# EAGLE board L6470 AutoDriver Panel v10 (EAGLE 6.4)
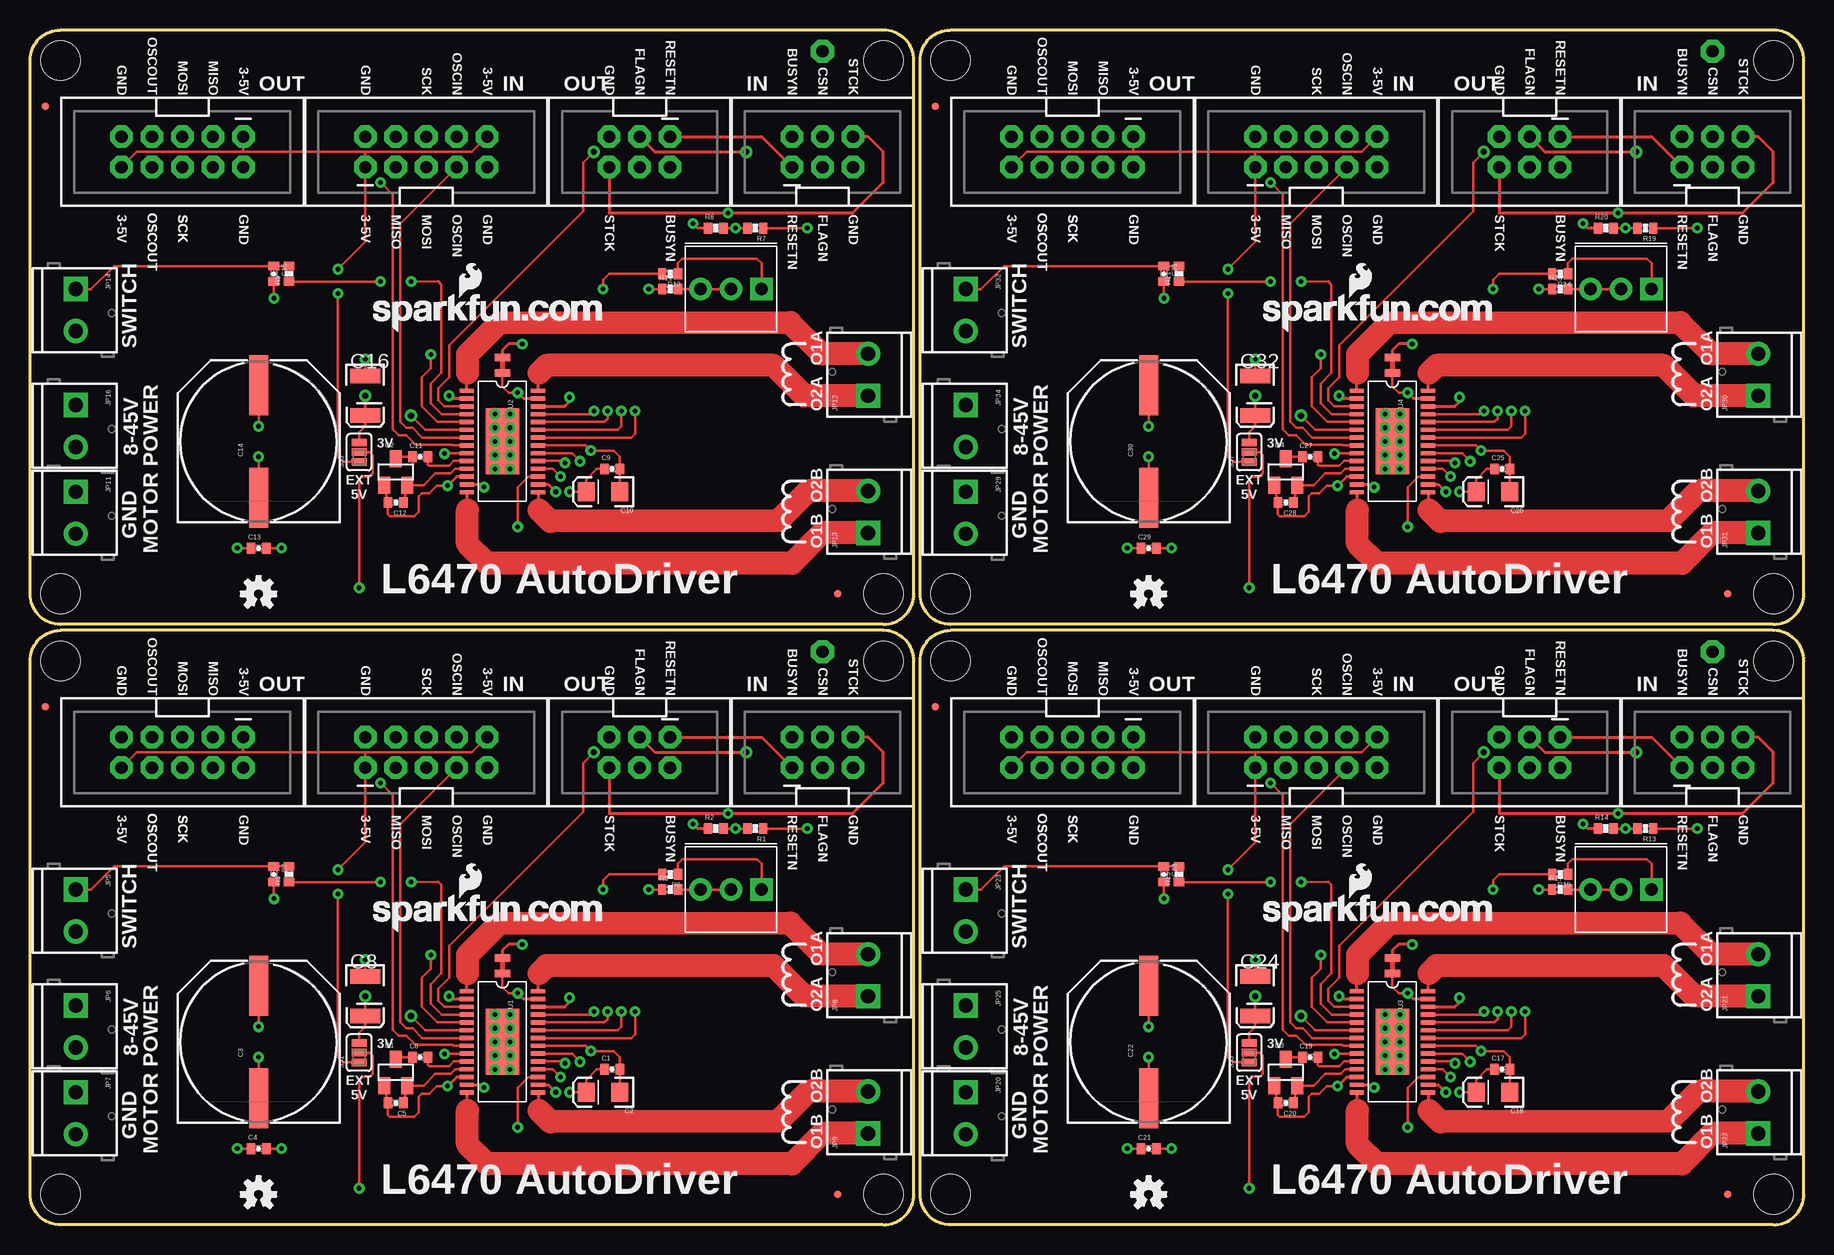
[diagram p0: board, top side]
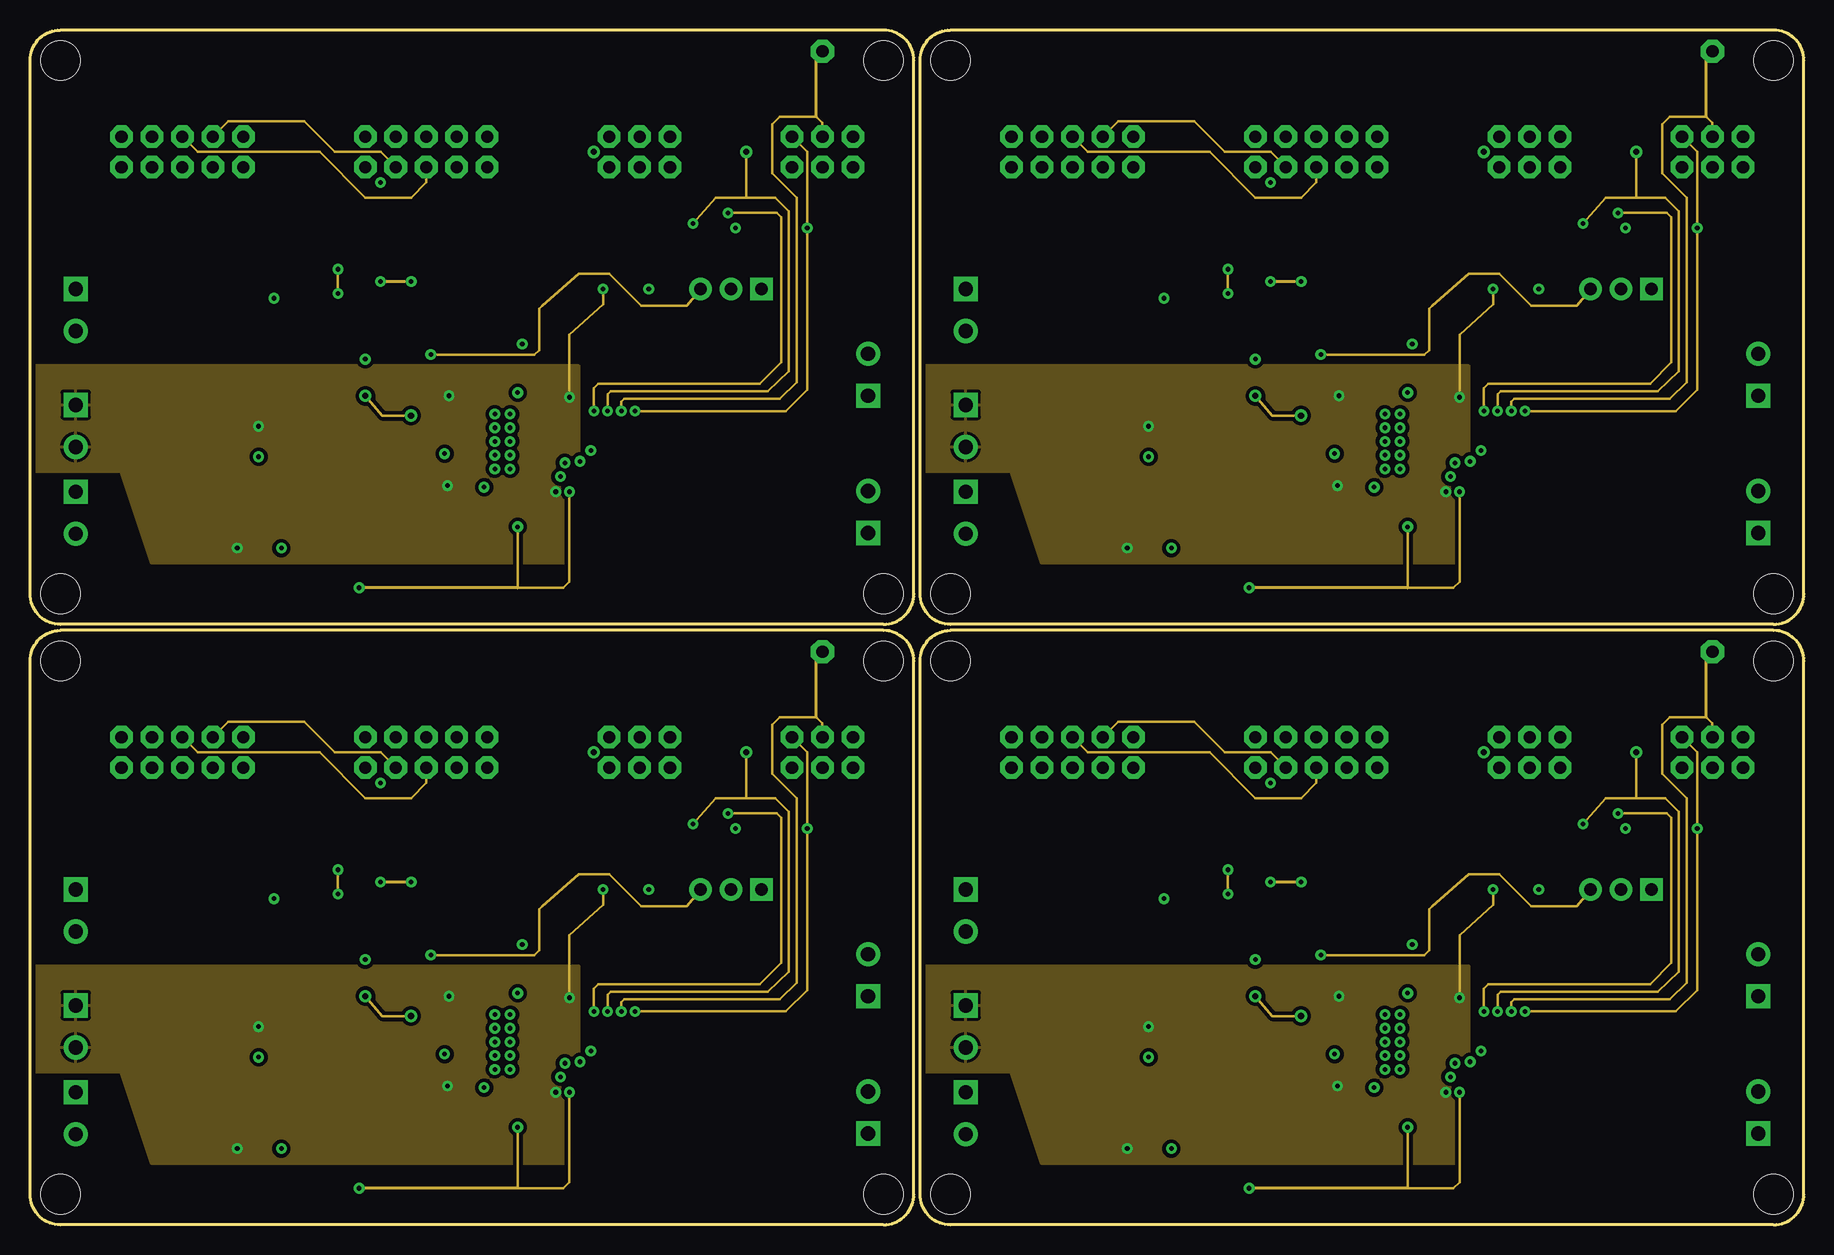
[diagram p1: board, inner layer Route2]
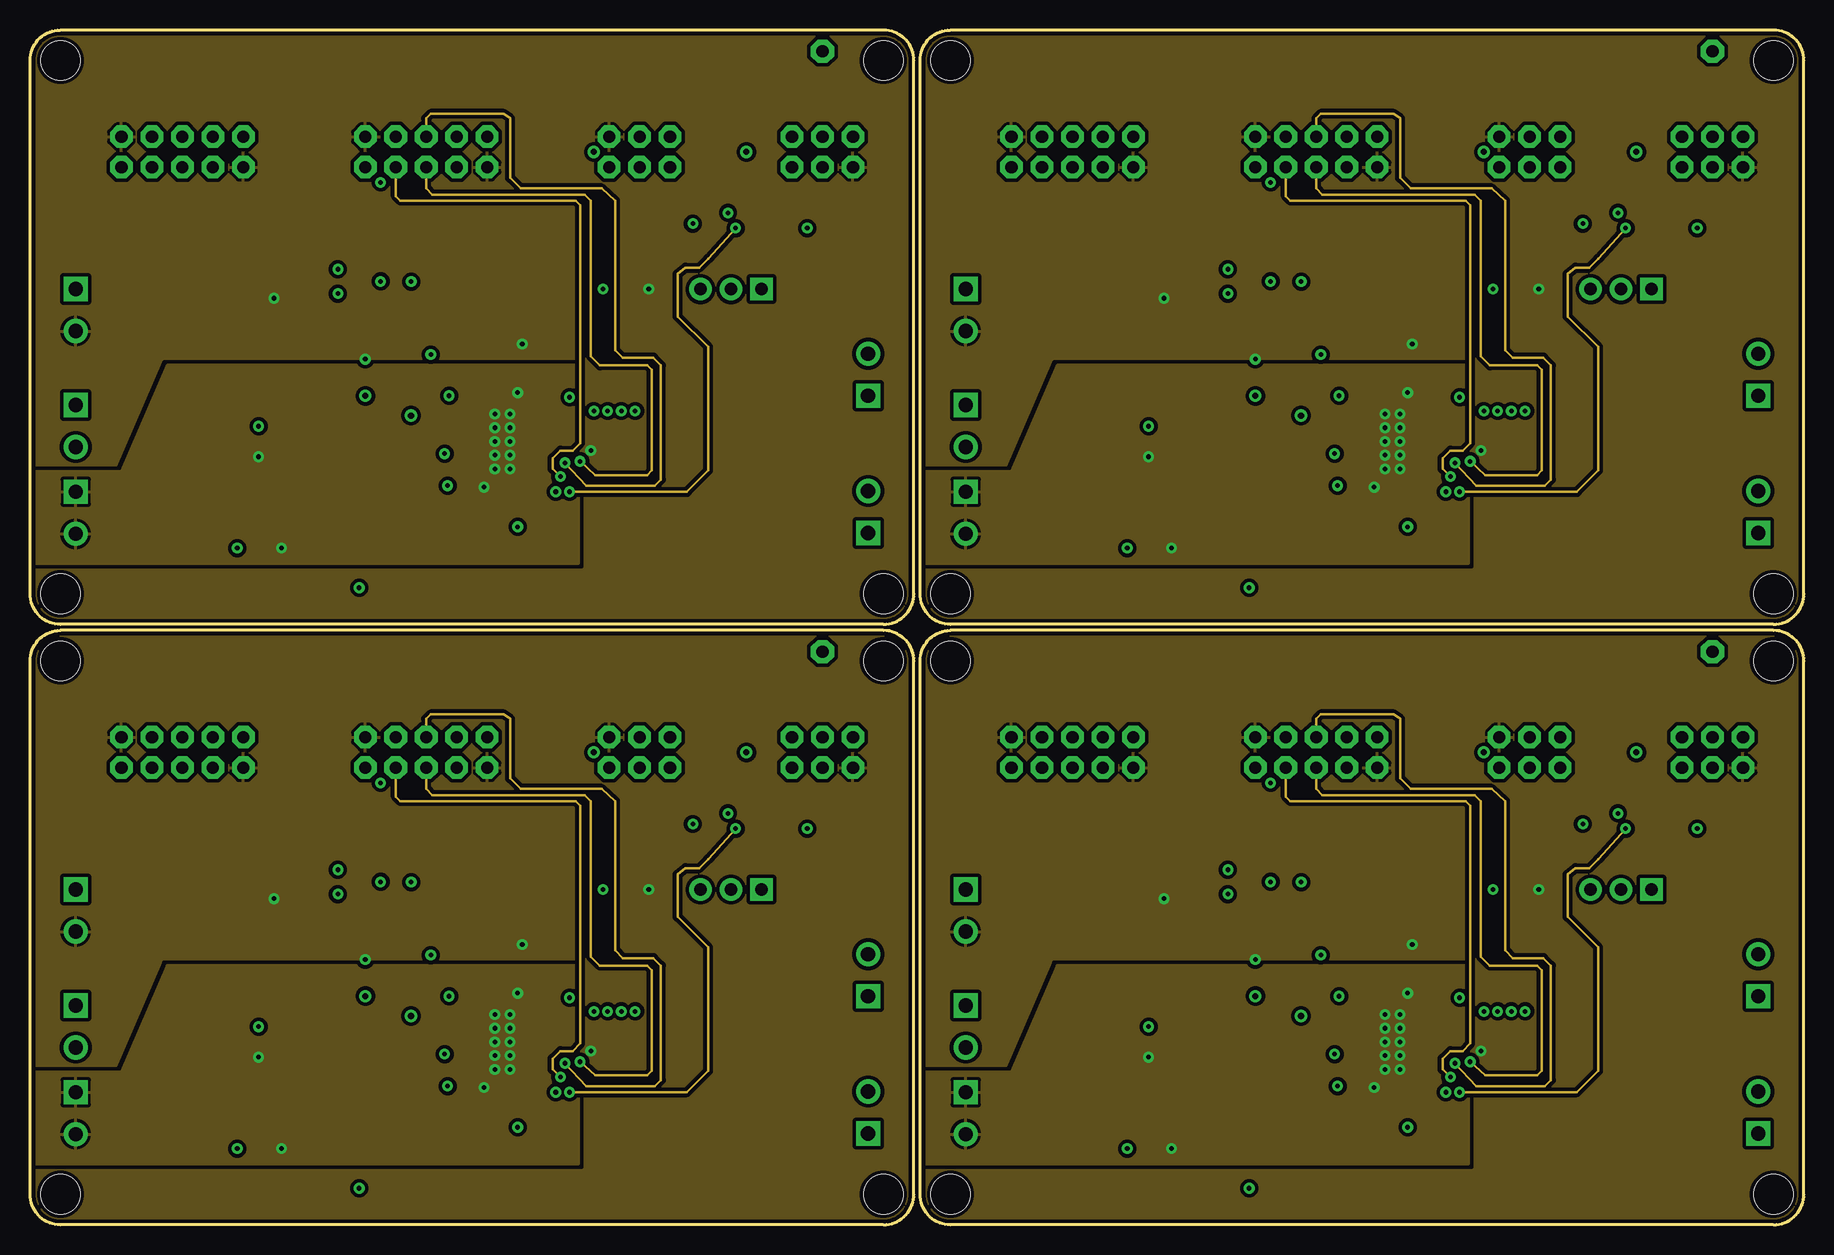
[diagram p2: board, inner layer Route15]
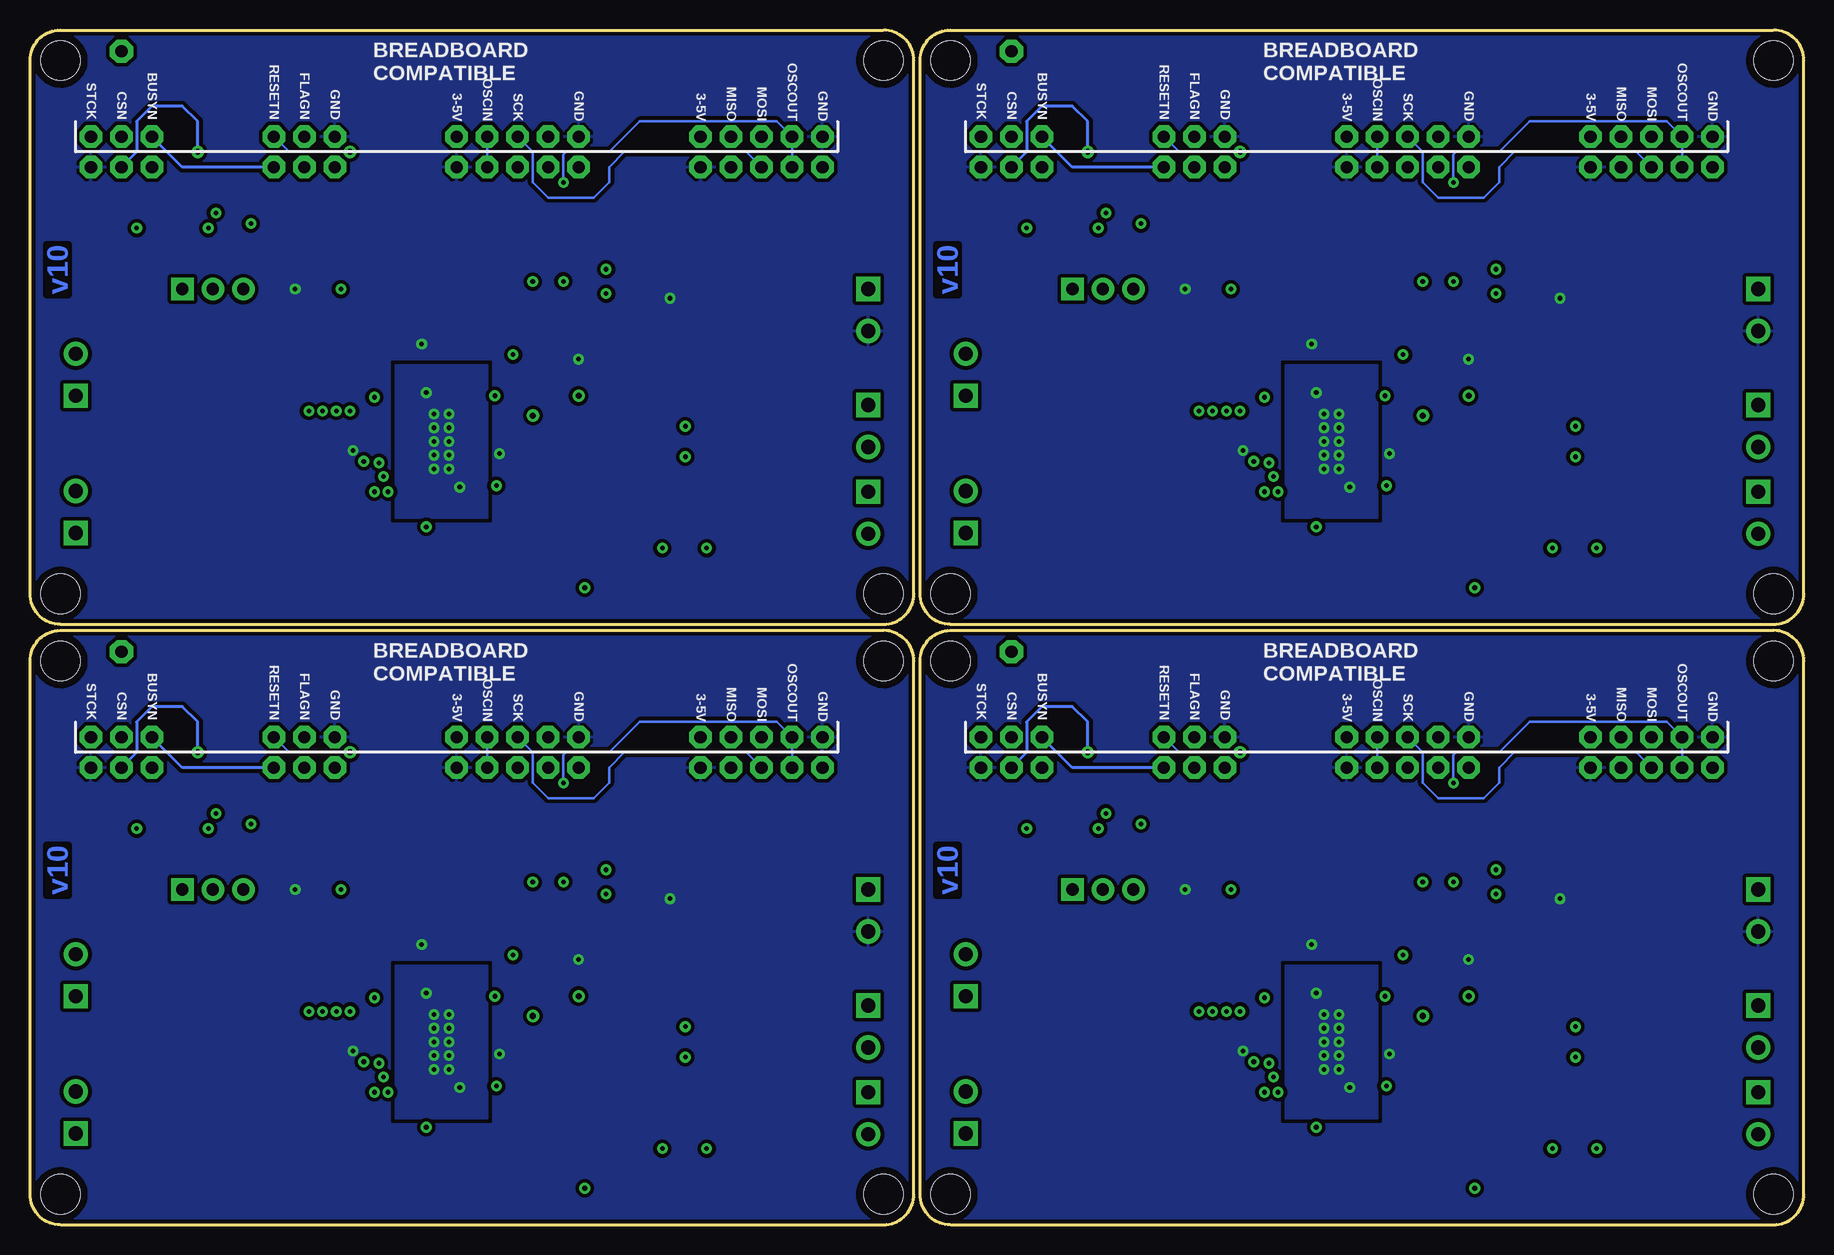
[diagram p3: board, bottom side, seen from below]

Size 147.83 x 99.57 mm. Coordinates in mm from the lower left corner, seen from the top.
Outline: 71.12,0 2.54,0 arc-90 0,2.54 0,46.99 arc-90 2.54,49.53 71.12,49.53 arc-90 73.66,46.99 73.66,2.54 arc-90 71.12,0
Outline: 71.12,50.04 2.54,50.04 arc-90 0,52.58 0,97.03 arc-90 2.54,99.57 71.12,99.57 arc-90 73.66,97.03 73.66,52.58 arc-90 71.12,50.04
Outline: 145.29,0 76.71,0 arc-90 74.17,2.54 74.17,46.99 arc-90 76.71,49.53 145.29,49.53 arc-90 147.83,46.99 147.83,2.54 arc-90 145.29,0
Outline: 145.29,50.04 76.71,50.04 arc-90 74.17,52.58 74.17,97.03 arc-90 76.71,99.57 145.29,99.57 arc-90 147.83,97.03 147.83,52.58 arc-90 145.29,50.04
Copper layers (1*2*15*16): Top 0.035mm / dielectric 1.5mm / Route2 0.035mm / dielectric 0.15mm / Route15 0.035mm / dielectric 0.2mm / Bottom 0.035mm
Design rules "default": minimum track width 8mil, minimum drill 15mil, track to track 8mil, track to pad 8mil, pad to pad 8mil, via to via 8mil, smd to smd 8mil, copper to edge 8mil, drill to drill 8mil, minimum pad ring 12mil, minimum via ring 10mil, stop-mask expansion 4mil, vias tented up to drill 20mil, thermal gap 10mil

## Footprints (pad centres in the part's own frame; a part is rotated, then mirrored left to right if it is on the bottom)
0402-CAP = smd 0.7 x 0.9: 1 -0.65,0; 2 0.65,0
EIA3216 = smd 1.4 x 1.6: A 1.4,0; C -1.4,0
PANASONIC_H13 = smd 5 x 1.6: + 4.7,0; - -4.7,0
EIA3528 = smd 1.2 x 2.5: A 1.65,0; C -1.65,0
SOT23 = smd 1 x 1.4: 1 -0.95,-1.1; 2 0.95,-1.1; 3 0,1.1
MICRO-FIDUCIAL = smd 0.635 x 0.635: 1 0,0
2X5-SHROUDED = drill 1.016 pad 1.88 octagon: 1 -1.27,5.08; 2 1.27,5.08; 3 -1.27,2.54; 4 1.27,2.54; 5 -1.27,0; 6 1.27,0; 7 -1.27,-2.54; 8 1.27,-2.54; 9 -1.27,-5.08; 10 1.27,-5.08
2X3-SHROUDED = drill 1.016 pad 1.88 octagon: 1 -1.27,2.54; 2 1.27,2.54; 3 -1.27,0; 4 1.27,0; 5 -1.27,-2.54; 6 1.27,-2.54
SCREWTERMINAL-3.5MM-2 = drill 1.2 pad 2.032 square: 1 0,0 | drill 1.2 pad 2.032: 2 3.5,0
0402-RES = smd 0.7 x 0.9: 1 -0.65,0; 2 0.65,0
3362U = drill 1.016 pad 1.88 square: P$1 0,2.54 | drill 1.016 pad 1.88: P$2 2.54,2.54; P$3 5.08,2.54
SJ_3_PASTE1&2 = smd 0.635 x 1.27: 1 -0.813,0; 2 0,0; 3 0.813,0
2PT_GND_TIE = smd 1.27 x 0.635: P$1 0,0.635; P$2 0,-0.635
STAND-OFF = hole 3.302: 0,0
HTSSOP28 = smd 0.36 x 1.19: 1 -4.225,-2.97; 2 -3.575,-2.97; 3 -2.925,-2.97; 4 -2.275,-2.97; 5 -1.625,-2.97; 6 -0.975,-2.97; 7 -0.325,-2.97; 8 0.325,-2.97; 9 0.975,-2.97; 10 1.625,-2.97; 11 2.275,-2.97; 12 2.925,-2.97; 13 3.575,-2.97; 14 4.225,-2.97; 15 4.225,2.97; 16 3.575,2.97; 17 2.925,2.97; 18 2.275,2.97; 19 1.625,2.97; 20 0.975,2.97; 21 0.325,2.97; 22 -0.325,2.97; 23 -0.975,2.97; 24 -1.625,2.97; 25 -2.275,2.97; 26 -2.925,2.97; 27 -3.575,2.97; 28 -4.225,2.97 | smd 5.5 x 2.8: 29 0,0

## Placement (x,y rotation side)
C1  0.1uF  [0402-CAP]  48.51,12.95 0 top
C2  10uF  [EIA3216]  47.75,11.05 180 top
C3  100uF  [PANASONIC_H13]  19.05,15.24 90 top
C4  0.22uF  [0402-CAP]  19.05,6.35 0 top
C5  10nF  [0402-CAP]  30.48,10.16 180 top
C6  10nF  [0402-CAP]  32.51,13.97 0 top
C7  10nF  [0402-CAP]  20.32,29.21 270 top
C8  47uF  [EIA3528]  27.94,19.05 270 top
C9  0.1uF  [0402-CAP]  48.51,62.99 0 top
C10  10uF  [EIA3216]  47.75,61.09 180 top
C11  10nF  [0402-CAP]  32.51,64.01 0 top
C12  10nF  [0402-CAP]  30.48,60.2 180 top
C13  0.22uF  [0402-CAP]  19.05,56.39 0 top
C14  100uF  [PANASONIC_H13]  19.05,65.28 90 top
C15  10nF  [0402-CAP]  20.32,79.25 270 top
C16  47uF  [EIA3528]  27.94,69.09 270 top
C17  0.1uF  [0402-CAP]  122.68,12.95 0 top
C18  10uF  [EIA3216]  121.92,11.05 180 top
C19  10nF  [0402-CAP]  106.68,13.97 0 top
C20  10nF  [0402-CAP]  104.65,10.16 180 top
C21  0.22uF  [0402-CAP]  93.22,6.35 0 top
C22  100uF  [PANASONIC_H13]  93.22,15.24 90 top
C23  10nF  [0402-CAP]  94.49,29.21 270 top
C24  47uF  [EIA3528]  102.11,19.05 270 top
C25  0.1uF  [0402-CAP]  122.68,62.99 0 top
C26  10uF  [EIA3216]  121.92,61.09 180 top
C27  10nF  [0402-CAP]  106.68,64.01 0 top
C28  10nF  [0402-CAP]  104.65,60.2 180 top
C29  0.22uF  [0402-CAP]  93.22,56.39 0 top
C30  100uF  [PANASONIC_H13]  93.22,65.28 90 top
C31  10nF  [0402-CAP]  94.49,79.25 270 top
C32  47uF  [EIA3528]  102.11,69.09 270 top
D1  BAV99  [SOT23]  30.48,12.7 0 top
D2  BAV99  [SOT23]  30.48,62.74 0 top
D3  BAV99  [SOT23]  104.65,12.7 0 top
D4  BAV99  [SOT23]  104.65,62.74 0 top
FID1  FIDUCIALUFIDUCIAL  [MICRO-FIDUCIAL]  67.31,2.54 0 top
FID2  FIDUCIALUFIDUCIAL  [MICRO-FIDUCIAL]  1.27,43.18 0 top
FID3  FIDUCIALUFIDUCIAL  [MICRO-FIDUCIAL]  67.31,52.58 0 top
FID4  FIDUCIALUFIDUCIAL  [MICRO-FIDUCIAL]  1.27,93.22 0 top
FID5  FIDUCIALUFIDUCIAL  [MICRO-FIDUCIAL]  141.48,2.54 0 top
FID6  FIDUCIALUFIDUCIAL  [MICRO-FIDUCIAL]  75.44,43.18 0 top
FID7  FIDUCIALUFIDUCIAL  [MICRO-FIDUCIAL]  141.48,52.58 0 top
FID8  FIDUCIALUFIDUCIAL  [MICRO-FIDUCIAL]  75.44,93.22 0 top
JP1  M05X2SHD  [2X5-SHROUDED]  33.02,39.37 90 top
JP2  M05X2SHD  [2X5-SHROUDED]  12.7,39.37 270 top
JP3  [2X3-SHROUDED]  50.8,39.37 270 top
JP4  [2X3-SHROUDED]  66.04,39.37 90 top
JP5  [SCREWTERMINAL-3.5MM-2]  3.81,27.94 270 top
JP6  [SCREWTERMINAL-3.5MM-2]  3.81,18.29 270 top
JP7  [SCREWTERMINAL-3.5MM-2]  3.81,11.05 270 top
JP8  [SCREWTERMINAL-3.5MM-2]  69.85,19.05 90 top
JP9  [SCREWTERMINAL-3.5MM-2]  69.85,7.62 90 top
JP10  M05X2SHD  [2X5-SHROUDED]  12.7,89.41 270 top
JP11  [SCREWTERMINAL-3.5MM-2]  3.81,61.09 270 top
JP12  [SCREWTERMINAL-3.5MM-2]  69.85,69.09 90 top
JP13  [SCREWTERMINAL-3.5MM-2]  69.85,57.66 90 top
JP14  [SCREWTERMINAL-3.5MM-2]  3.81,77.98 270 top
JP15  M05X2SHD  [2X5-SHROUDED]  33.02,89.41 90 top
JP16  [SCREWTERMINAL-3.5MM-2]  3.81,68.33 270 top
JP17  [2X3-SHROUDED]  50.8,89.41 270 top
JP18  [2X3-SHROUDED]  66.04,89.41 90 top
JP19  M05X2SHD  [2X5-SHROUDED]  86.87,39.37 270 top
JP20  [SCREWTERMINAL-3.5MM-2]  77.98,11.05 270 top
JP21  [SCREWTERMINAL-3.5MM-2]  144.02,19.05 90 top
JP22  [SCREWTERMINAL-3.5MM-2]  144.02,7.62 90 top
JP23  [SCREWTERMINAL-3.5MM-2]  77.98,27.94 270 top
JP24  M05X2SHD  [2X5-SHROUDED]  107.19,39.37 90 top
JP25  [SCREWTERMINAL-3.5MM-2]  77.98,18.29 270 top
JP26  [2X3-SHROUDED]  124.97,39.37 270 top
JP27  [2X3-SHROUDED]  140.21,39.37 90 top
JP28  M05X2SHD  [2X5-SHROUDED]  86.87,89.41 270 top
JP29  [SCREWTERMINAL-3.5MM-2]  77.98,61.09 270 top
JP30  [SCREWTERMINAL-3.5MM-2]  144.02,69.09 90 top
JP31  [SCREWTERMINAL-3.5MM-2]  144.02,57.66 90 top
JP32  [SCREWTERMINAL-3.5MM-2]  77.98,77.98 270 top
JP33  M05X2SHD  [2X5-SHROUDED]  107.19,89.41 90 top
JP34  [SCREWTERMINAL-3.5MM-2]  77.98,68.33 270 top
JP35  [2X3-SHROUDED]  124.97,89.41 270 top
JP36  [2X3-SHROUDED]  140.21,89.41 90 top
LOGO1  OSHW-LOGOS  [OSHW-LOGO-S]  19.05,2.54 0 top
LOGO2  LOGO-SFENEW  [SFE-NEW-WEBLOGO]  28.57,24.38 0 top
LOGO3  LOGO-SFENEW  [SFE-NEW-WEBLOGO]  28.57,74.42 0 top
LOGO4  OSHW-LOGOS  [OSHW-LOGO-S]  19.05,52.58 0 top
LOGO5  LOGO-SFENEW  [SFE-NEW-WEBLOGO]  102.74,24.38 0 top
LOGO6  OSHW-LOGOS  [OSHW-LOGO-S]  93.22,2.54 0 top
LOGO7  LOGO-SFENEW  [SFE-NEW-WEBLOGO]  102.74,74.42 0 top
LOGO8  OSHW-LOGOS  [OSHW-LOGO-S]  93.22,52.58 0 top
R1  10k  [0402-RES]  60.45,33.02 180 top
R2  10k  [0402-RES]  57.15,33.02 0 top
R3  100  [0402-RES]  21.59,29.21 90 top
R4  200k  [3362U]  60.96,30.48 180 top
R5  8.2k  [0402-RES]  53.34,27.94 0 top
R6  33k  [0402-RES]  53.34,29.21 180 top
R7  10k  [0402-RES]  60.45,83.06 180 top
R8  10k  [0402-RES]  57.15,83.06 0 top
R9  100  [0402-RES]  21.59,79.25 90 top
R10  200k  [3362U]  60.96,80.52 180 top
R11  8.2k  [0402-RES]  53.34,77.98 0 top
R12  33k  [0402-RES]  53.34,79.25 180 top
R13  10k  [0402-RES]  134.62,33.02 180 top
R14  10k  [0402-RES]  131.32,33.02 0 top
R15  100  [0402-RES]  95.76,29.21 90 top
R16  200k  [3362U]  135.13,30.48 180 top
R17  8.2k  [0402-RES]  127.51,27.94 0 top
R18  33k  [0402-RES]  127.51,29.21 180 top
R19  10k  [0402-RES]  134.62,83.06 180 top
R20  10k  [0402-RES]  131.32,83.06 0 top
R21  100  [0402-RES]  95.76,79.25 90 top
R22  200k  [3362U]  135.13,80.52 180 top
R23  8.2k  [0402-RES]  127.51,77.98 0 top
R24  33k  [0402-RES]  127.51,79.25 180 top
SJ1  [SJ_3_PASTE1&2]  27.43,14.35 90 top
SJ2  2PT_GND_TIE  [2PT_GND_TIE]  39.37,21.59 0 top
SJ3  [SJ_3_PASTE1&2]  27.43,64.39 90 top
SJ4  2PT_GND_TIE  [2PT_GND_TIE]  39.37,71.63 0 top
SJ5  [SJ_3_PASTE1&2]  101.6,14.35 90 top
SJ6  2PT_GND_TIE  [2PT_GND_TIE]  113.54,21.59 0 top
SJ7  [SJ_3_PASTE1&2]  101.6,64.39 90 top
SJ8  2PT_GND_TIE  [2PT_GND_TIE]  113.54,71.63 0 top
STANDOFF1  STAND-OFF  [STAND-OFF]  71.12,46.99 0 top
STANDOFF2  STAND-OFF  [STAND-OFF]  71.12,2.54 0 top
STANDOFF3  STAND-OFF  [STAND-OFF]  2.54,2.54 0 top
STANDOFF4  STAND-OFF  [STAND-OFF]  2.54,46.99 0 top
STANDOFF5  STAND-OFF  [STAND-OFF]  71.12,52.58 0 top
STANDOFF6  STAND-OFF  [STAND-OFF]  2.54,97.03 0 top
STANDOFF7  STAND-OFF  [STAND-OFF]  71.12,97.03 0 top
STANDOFF8  STAND-OFF  [STAND-OFF]  2.54,52.58 0 top
STANDOFF9  STAND-OFF  [STAND-OFF]  145.29,2.54 0 top
STANDOFF10  STAND-OFF  [STAND-OFF]  76.71,46.99 0 top
STANDOFF11  STAND-OFF  [STAND-OFF]  145.29,46.99 0 top
STANDOFF12  STAND-OFF  [STAND-OFF]  76.71,2.54 0 top
STANDOFF13  STAND-OFF  [STAND-OFF]  145.29,52.58 0 top
STANDOFF14  STAND-OFF  [STAND-OFF]  76.71,97.03 0 top
STANDOFF15  STAND-OFF  [STAND-OFF]  145.29,97.03 0 top
STANDOFF16  STAND-OFF  [STAND-OFF]  76.71,52.58 0 top
U1  L6470  [HTSSOP28]  39.37,15.24 270 top
U2  L6470  [HTSSOP28]  39.37,65.28 270 top
U3  L6470  [HTSSOP28]  113.54,15.24 270 top
U4  L6470  [HTSSOP28]  113.54,65.28 270 top
U$1  FOUR_LAYER_WARNING  [FOUR_LAYER_WARNING]  74.17,-2.54 0 top
U$4  FOUR_LAYER_WARNING  [FOUR_LAYER_WARNING]  0,-2.54 0 top

## Library data of the parts
C1 C9 C17 C25 = SparkFun-Capacitors; PROD_ID: CAP-00810
C2 C10 C18 C26 = SparkFun-Capacitors; PROD_ID: CAP-00811
C3 C14 C22 C30 = SparkFun-Capacitors; PROD_ID: CAP-08362
C4 C13 C21 C29 = SparkFun-Capacitors; PROD_ID: CAP-09885; VALUE: .22uF
C5-C7 C11 C12 C15 C19 C20 C23 C27 C28 C31 = SparkFun-Capacitors; PROD_ID: CAP-00867
C8 C16 C24 C32 = SparkFun-Capacitors; PROD_ID: CAP-08310
D1-D4 = SparkFun-DiscreteSemi; PROD_ID: DIO-10647
FID1-FID8 U$1 U$4 = SparkFun-Aesthetics
JP1-JP4 JP10 JP15 JP17-JP19 JP24 JP26-JP28 JP33 JP35 JP36 = SparkFun-Connectors
JP5-JP9 JP11-JP14 JP16 JP20-JP23 JP25 JP29-JP32 JP34 LOGO1-LOGO8 R4 R10 R16 R22 STANDOFF1-STANDOFF16 = SparkFun
R1 R2 R7 R8 R13 R14 R19 R20 = SparkFun-Resistors; PROD_ID: RES-00824
R3 R9 R15 R21 = SparkFun-Resistors; PROD_ID: RES-07863
R5 R11 R17 R23 = SparkFun-Resistors; PROD_ID: RES-10646
R6 R12 R18 R24 = SparkFun-Resistors; PROD_ID: RES-08416
SJ1-SJ8 = SparkFun-Passives
U1-U4 = SparkFun-PowerIC; PROD_ID: IC-10648

## Nets
3.3V: C8.A SJ1.3 U1.6
3.3V1: C16.A SJ3.3 U2.6
3.3V2: C24.A SJ5.3 U3.6
3.3V3: C32.A SJ7.3 U4.6
5V: JP1.1 JP1.10 JP2.1 JP2.10 SJ1.1
5V1: JP10.1 JP10.10 JP15.1 JP15.10 SJ3.1
5V2: JP19.1 JP19.10 JP24.1 JP24.10 SJ5.1
5V3: JP28.1 JP28.10 JP33.1 JP33.10 SJ7.1
ADC: R4.P$2 R4.P$3 R5.2 U1.5
ADC1: R10.P$2 R10.P$3 R11.2 U2.5
ADC2: R16.P$2 R16.P$3 R17.2 U3.5
ADC3: R22.P$2 R22.P$3 R23.2 U4.5
BUSYN: JP3.2 JP4.2 R1.1 U1.22
BUSYN1: JP17.2 JP18.2 R7.1 U2.22
BUSYN2: JP26.2 JP27.2 R13.1 U3.22
BUSYN3: JP35.2 JP36.2 R19.1 U4.22
CSN: JP4.4 U1.23
CSN1: JP18.4 U2.23
CSN2: JP27.4 U3.23
CSN3: JP36.4 U4.23
FLAGN: JP3.3 JP4.3 R2.1 U1.24
FLAGN1: JP17.3 JP18.3 R8.1 U2.24
FLAGN2: JP26.3 JP27.3 R14.1 U3.24
FLAGN3: JP35.3 JP36.3 R20.1 U4.24
GND: C1.2 C2.C C7.2 C8.C JP1.2 JP1.9 JP2.2 JP2.9 JP3.5 JP4.5 JP5.2 R5.1 SJ2.P$1 U1.9 U1.21
GND1: C9.2 C10.C C15.2 C16.C JP10.2 JP10.9 JP14.2 JP15.2 JP15.9 JP17.5 JP18.5 R11.1 SJ4.P$1 U2.9 U2.21
GND2: C17.2 C18.C C23.2 C24.C JP19.2 JP19.9 JP23.2 JP24.2 JP24.9 JP26.5 JP27.5 R17.1 SJ6.P$1 U3.9 U3.21
GND3: C25.2 C26.C C31.2 C32.C JP28.2 JP28.9 JP32.2 JP33.2 JP33.9 JP35.5 JP36.5 R23.1 SJ8.P$1 U4.9 U4.21
MISO: JP1.3 JP2.3 U1.18
MISO1: JP10.3 JP15.3 U2.18
MISO2: JP19.3 JP24.3 U3.18
MISO3: JP28.3 JP33.3 U4.18
MOSI: JP1.5 JP2.5 U1.20
MOSI1: JP10.5 JP15.5 U2.20
MOSI2: JP19.5 JP24.5 U3.20
MOSI3: JP28.5 JP33.5 U4.20
N$1: C11.2 U2.10
N$2: C11.1 D2.3
N$3: C12.1 D2.2 U2.11
N$4: R9.1 U2.4
N$5: R3.1 U1.4
N$6: C7.1 JP5.1 R3.2
N$7: C6.2 U1.10
N$8: C6.1 D1.3
N$9: C5.1 D1.2 U1.11
N$10: C15.1 JP14.1 R9.2
N$11: R4.P$1 R6.1
N$12: R10.P$1 R12.1
N$13: C19.2 U3.10
N$14: C19.1 D3.3
N$15: C20.1 D3.2 U3.11
N$16: R15.1 U3.4
N$17: C23.1 JP23.1 R15.2
N$18: R16.P$1 R18.1
N$19: C27.2 U4.10
N$20: C27.1 D4.3
N$21: C28.1 D4.2 U4.11
N$22: R21.1 U4.4
N$23: C31.1 JP32.1 R21.2
N$24: R22.P$1 R24.1
OSCIN: JP1.7 JP1.8 U1.7
OSCIN1: JP15.7 JP15.8 U2.7
OSCIN2: JP24.7 JP24.8 U3.7
OSCIN3: JP33.7 JP33.8 U4.7
OSCOUT: JP2.7 JP2.8 U1.8
OSCOUT1: JP10.7 JP10.8 U2.8
OSCOUT2: JP19.7 JP19.8 U3.8
OSCOUT3: JP28.7 JP28.8 U4.8
OUT1A: JP8.2 U1.1
OUT1A1: JP12.2 U2.1
OUT1A2: JP21.2 U3.1
OUT1A3: JP30.2 U4.1
OUT1B: JP9.1 U1.14
OUT1B1: JP13.1 U2.14
OUT1B2: JP22.1 U3.14
OUT1B3: JP31.1 U4.14
OUT2A: JP8.1 U1.28
OUT2A1: JP12.1 U2.28
OUT2A2: JP21.1 U3.28
OUT2A3: JP30.1 U4.28
OUT2B: JP9.2 U1.15
OUT2B1: JP13.2 U2.15
OUT2B2: JP22.2 U3.15
OUT2B3: JP31.2 U4.15
PGND: C3.- C4.2 JP7.1 JP7.2 SJ2.P$2 U1.13 U1.27 U1.29
PGND1: C13.2 C14.- JP11.1 JP11.2 SJ4.P$2 U2.13 U2.27 U2.29
PGND2: C21.2 C22.- JP20.1 JP20.2 SJ6.P$2 U3.13 U3.27 U3.29
PGND3: C29.2 C30.- JP29.1 JP29.2 SJ8.P$2 U4.13 U4.27 U4.29
RESETN: JP3.1 JP4.1 U1.3
RESETN1: JP17.1 JP18.1 U2.3
RESETN2: JP26.1 JP27.1 U3.3
RESETN3: JP35.1 JP36.1 U4.3
SCK: JP1.6 JP2.6 U1.19
SCK1: JP10.6 JP15.6 U2.19
SCK2: JP19.6 JP24.6 U3.19
SCK3: JP28.6 JP33.6 U4.19
STCK: JP3.6 JP4.6 U1.25
STCK1: JP17.6 JP18.6 U2.25
STCK2: JP26.6 JP27.6 U3.25
STCK3: JP35.6 JP36.6 U4.25
VLOGIC: C1.1 C2.A R1.2 R2.2 SJ1.2 U1.17
VLOGIC1: C9.1 C10.A R7.2 R8.2 SJ3.2 U2.17
VLOGIC2: C17.1 C18.A R13.2 R14.2 SJ5.2 U3.17
VLOGIC3: C25.1 C26.A R19.2 R20.2 SJ7.2 U4.17
VS: C3.+ C4.1 C5.2 D1.1 JP6.1 JP6.2 R6.2 U1.2 U1.12 U1.16 U1.26
VS1: C12.2 C13.1 C14.+ D2.1 JP16.1 JP16.2 R12.2 U2.2 U2.12 U2.16 U2.26
VS2: C20.2 C21.1 C22.+ D3.1 JP25.1 JP25.2 R18.2 U3.2 U3.12 U3.16 U3.26
VS3: C28.2 C29.1 C30.+ D4.1 JP34.1 JP34.2 R24.2 U4.2 U4.12 U4.16 U4.26

## Tracks (layer width: path | path; a pad name or v marks a point on that pad's centre or on a via)
3.3V  (via drill 0.51)
  Top 0.203: U1.6 32.93,16.21 v31.75,17.4 | v27.94,19.05 C8.A 27.94,16.51 27.43,16 SJ1.3
  Route2 0.203: v27.94,19.05 29.34,17.4 v31.75,17.4
3.3V1  (via drill 0.51)
  Top 0.203: U2.6 32.93,66.25 v31.75,67.44 | v27.94,69.09 C16.A 27.94,66.55 27.43,66.04 SJ3.3
  Route2 0.203: v27.94,69.09 29.34,67.44 v31.75,67.44
3.3V2  (via drill 0.51)
  Top 0.203: U3.6 107.1,16.21 v105.92,17.4 | v102.11,19.05 C24.A 102.11,16.51 101.6,16 SJ5.3
  Route2 0.203: v102.11,19.05 103.5,17.4 v105.92,17.4
3.3V3  (via drill 0.51)
  Top 0.203: U4.6 107.1,66.25 v105.92,67.44 | v102.11,69.09 C32.A 102.11,66.55 101.6,66.04 SJ7.3
  Route2 0.203: v102.11,69.09 103.5,67.44 v105.92,67.44
5V  (via drill 0.38)
  Top 0.203: SJ1.1 26.09,13.54 25.65,13.97 v25.65,27.56 | v25.65,29.59 27.94,31.88 JP1.1 27.94,39.37 | JP1.10 36.83,39.37 27.94,39.37 | 27.94,39.37 17.78,39.37 | 17.78,39.37 8.89,39.37 JP2.10 | JP2.1 17.78,39.37
  Route2 0.203: v25.65,27.56 v25.65,29.59
5V1  (via drill 0.38)
  Top 0.203: SJ3.1 26.09,63.58 25.65,64.01 v25.65,77.6 | v25.65,79.63 27.94,81.92 JP15.1 27.94,89.41 | JP15.10 36.83,89.41 27.94,89.41 | 27.94,89.41 17.78,89.41 | 17.78,89.41 8.89,89.41 JP10.10 | JP10.1 17.78,89.41
  Route2 0.203: v25.65,77.6 v25.65,79.63
5V2  (via drill 0.38)
  Top 0.203: SJ5.1 100.25,13.54 99.82,13.97 v99.82,27.56 | v99.82,29.59 102.11,31.88 JP24.1 102.11,39.37 | JP24.10 111,39.37 102.11,39.37 | 102.11,39.37 91.95,39.37 | 91.95,39.37 83.06,39.37 JP19.10 | JP19.1 91.95,39.37
  Route2 0.203: v99.82,27.56 v99.82,29.59
5V3  (via drill 0.38)
  Top 0.203: SJ7.1 100.25,63.58 99.82,64.01 v99.82,77.6 | v99.82,79.63 102.11,81.92 JP33.1 102.11,89.41 | JP33.10 111,89.41 102.11,89.41 | 102.11,89.41 91.95,89.41 | 91.95,89.41 83.06,89.41 JP28.10 | JP28.1 91.95,89.41
  Route2 0.203: v99.82,77.6 v99.82,79.63
ADC  (via drill 0.38)
  Top 0.203: U1.5 33.94,16.86 32.64,18.16 32.64,20.57 33.4,21.34 v33.4,22.48 | R5.2 R4.P$3 R4.P$2
  Route2 0.203: v33.4,22.48 42.04,22.48 42.42,22.86 42.42,26.29 42.67,26.54 45.72,29.21 48.26,29.21 50.93,26.54 54.74,26.54 R4.P$3
ADC1  (via drill 0.38)
  Top 0.203: U2.5 33.94,66.9 32.64,68.2 32.64,70.61 33.4,71.37 v33.4,72.52 | R11.2 R10.P$3 R10.P$2
  Route2 0.203: v33.4,72.52 42.04,72.52 42.42,72.9 42.42,76.33 42.67,76.58 45.72,79.25 48.26,79.25 50.93,76.58 54.74,76.58 R10.P$3
ADC2  (via drill 0.38)
  Top 0.203: U3.5 108.1,16.86 106.81,18.16 106.81,20.57 107.57,21.34 v107.57,22.48 | R17.2 R16.P$3 R16.P$2
  Route2 0.203: v107.57,22.48 116.2,22.48 116.59,22.86 116.59,26.29 116.84,26.54 119.89,29.21 122.43,29.21 125.09,26.54 128.91,26.54 R16.P$3
ADC3  (via drill 0.38)
  Top 0.203: U4.5 108.1,66.9 106.81,68.2 106.81,70.61 107.57,71.37 v107.57,72.52 | R23.2 R22.P$3 R22.P$2
  Route2 0.203: v107.57,72.52 116.2,72.52 116.59,72.9 116.59,76.33 116.84,76.58 119.89,79.25 122.43,79.25 125.09,76.58 128.91,76.58 R22.P$3
BUSYN  (via drill 0.38)
  Top 0.203: U1.22 50.11,15.56 50.42,15.88 v50.42,17.78 | R1.1 v64.77,33.02
  Route2 0.203: v50.42,17.78 62.99,17.78 64.77,19.56 v64.77,33.02 64.77,39.37 JP4.2
  Bottom 0.254: JP3.2 60.96,38.1 JP4.2
BUSYN1  (via drill 0.38)
  Top 0.203: U2.22 50.11,65.6 50.42,65.91 v50.42,67.82 | R7.1 v64.77,83.06
  Route2 0.203: v50.42,67.82 62.99,67.82 64.77,69.6 v64.77,83.06 64.77,89.41 JP18.2
  Bottom 0.254: JP17.2 60.96,88.14 JP18.2
BUSYN2  (via drill 0.38)
  Top 0.203: U3.22 124.28,15.56 124.59,15.88 v124.59,17.78 | R13.1 v138.94,33.02
  Route2 0.203: v124.59,17.78 137.16,17.78 138.94,19.56 v138.94,33.02 138.94,39.37 JP27.2
  Bottom 0.254: JP26.2 135.13,38.1 JP27.2
BUSYN3  (via drill 0.38)
  Top 0.203: U4.22 124.28,65.6 124.59,65.91 v124.59,67.82 | R19.1 v138.94,83.06
  Route2 0.203: v124.59,67.82 137.16,67.82 138.94,69.6 v138.94,83.06 138.94,89.41 JP36.2
  Bottom 0.254: JP35.2 135.13,88.14 JP36.2
CSN  (via drill 0.38, 1.02 pad 1.93)
  Top 0.203: U1.23 48.98,16.21 49.28,16.51 v49.28,17.78
  Route2 0.203: v49.28,17.78 49.28,18.54 49.53,18.8 62.48,18.8 63.88,20.19 63.88,35.56 61.85,37.59 61.85,41.66 62.48,42.29 65.53,42.29 66.04,41.78 JP4.4
  Route2 0.254: 65.53,42.29 65.53,47.24 v66.04,47.75
CSN1  (via drill 0.38, 1.02 pad 1.93)
  Top 0.203: U2.23 48.98,66.25 49.28,66.55 v49.28,67.82
  Route2 0.203: v49.28,67.82 49.28,68.58 49.53,68.83 62.48,68.83 63.88,70.23 63.88,85.6 61.85,87.63 61.85,91.69 62.48,92.33 65.53,92.33 66.04,91.82 JP18.4
  Route2 0.254: 65.53,92.33 65.53,97.28 v66.04,97.79
CSN2  (via drill 0.38, 1.02 pad 1.93)
  Top 0.203: U3.23 123.15,16.21 123.44,16.51 v123.44,17.78
  Route2 0.203: v123.44,17.78 123.44,18.54 123.7,18.8 136.65,18.8 138.05,20.19 138.05,35.56 136.02,37.59 136.02,41.66 136.65,42.29 139.7,42.29 140.21,41.78 JP27.4
  Route2 0.254: 139.7,42.29 139.7,47.24 v140.21,47.75
CSN3  (via drill 0.38, 1.02 pad 1.93)
  Top 0.203: U4.23 123.15,66.25 123.44,66.55 v123.44,67.82
  Route2 0.203: v123.44,67.82 123.44,68.58 123.7,68.83 136.65,68.83 138.05,70.23 138.05,85.6 136.02,87.63 136.02,91.69 136.65,92.33 139.7,92.33 140.21,91.82 JP36.4
  Route2 0.254: 139.7,92.33 139.7,97.28 v140.21,97.79
FLAGN  (via drill 0.38, 0.51)
  Top 0.203: U1.24 47.85,16.86 48.13,17.14 v48.13,17.78
  Top 0.254: JP3.3 52.07,39.37 v59.69,39.37 | R2.1 55.63,33.02 v55.24,33.4
  Route2 0.203: v48.13,17.78 48.13,19.18 48.39,19.43 61.47,19.43 63.25,21.08 63.25,34.42 62.1,35.56 59.69,35.56 | v55.24,33.4 57.15,35.56 59.69,35.56 | v59.69,39.37 59.69,35.56
  Bottom 0.254: v59.69,39.37 59.69,41.91 60.96,43.18 63.5,43.18 64.77,41.91 64.77,39.37 JP4.3
FLAGN1  (via drill 0.38, 0.51)
  Top 0.203: U2.24 47.85,66.9 48.13,67.18 v48.13,67.82
  Top 0.254: JP17.3 52.07,89.41 v59.69,89.41 | R8.1 55.63,83.06 v55.24,83.44
  Route2 0.203: v48.13,67.82 48.13,69.22 48.39,69.47 61.47,69.47 63.25,71.12 63.25,84.45 62.1,85.6 59.69,85.6 | v55.24,83.44 57.15,85.6 59.69,85.6 | v59.69,89.41 59.69,85.6
  Bottom 0.254: v59.69,89.41 59.69,91.95 60.96,93.22 63.5,93.22 64.77,91.95 64.77,89.41 JP18.3
FLAGN2  (via drill 0.38, 0.51)
  Top 0.203: U3.24 122.02,16.86 122.3,17.14 v122.3,17.78
  Top 0.254: JP26.3 126.24,39.37 v133.86,39.37 | R14.1 129.79,33.02 v129.41,33.4
  Route2 0.203: v122.3,17.78 122.3,19.18 122.56,19.43 135.64,19.43 137.41,21.08 137.41,34.42 136.27,35.56 133.86,35.56 | v129.41,33.4 131.32,35.56 133.86,35.56 | v133.86,39.37 133.86,35.56
  Bottom 0.254: v133.86,39.37 133.86,41.91 135.13,43.18 137.67,43.18 138.94,41.91 138.94,39.37 JP27.3
FLAGN3  (via drill 0.38, 0.51)
  Top 0.203: U4.24 122.02,66.9 122.3,67.18 v122.3,67.82
  Top 0.254: JP35.3 126.24,89.41 v133.86,89.41 | R20.1 129.79,83.06 v129.41,83.44
  Route2 0.203: v122.3,67.82 122.3,69.22 122.56,69.47 135.64,69.47 137.41,71.12 137.41,84.45 136.27,85.6 133.86,85.6 | v129.41,83.44 131.32,85.6 133.86,85.6 | v133.86,89.41 133.86,85.6
  Bottom 0.254: v133.86,89.41 133.86,91.95 135.13,93.22 137.67,93.22 138.94,91.95 138.94,89.41 JP36.3
GND  (via drill 0.38)
  Top 0.203: U1.21 46.3,14.91 v46.74,14.48 48.64,14.48 49.16,13.96 C1.2 C2.C | R5.1 v51.56,27.94 | U1.9 34.59,14.27 v34.54,14.22 | C8.C v27.94,22.1 | C7.2 v20.32,27.18
  Top 0.254: v41.02,23.37 39.88,23.37 39.37,22.86 SJ2.P$1
  pour Route15 (isolate 0.305, rank 2): 71.12,0 2.54,0 arc-90 0,2.54 0,46.99 arc-90 2.54,49.53 71.12,49.53 arc-90 73.66,46.99 73.66,2.54 arc-90
  pour Bottom (isolate 0.305, rank 2): 71.12,0 2.54,0 arc-90 0,2.54 0,46.99 arc-90 2.54,49.53 71.12,49.53 arc-90 73.66,46.99 73.66,2.54 arc-90
GND1  (via drill 0.38)
  Top 0.203: U2.21 46.3,64.95 v46.74,64.52 48.64,64.52 49.16,63.99 C9.2 C10.C | R11.1 v51.56,77.98 | U2.9 34.59,64.3 v34.54,64.26 | C16.C v27.94,72.14 | C15.2 v20.32,77.22
  Top 0.254: v41.02,73.41 39.88,73.41 39.37,72.9 SJ4.P$1
  pour Route15 (isolate 0.305, rank 2): 71.12,50.04 2.54,50.04 arc-90 0,52.58 0,97.03 arc-90 2.54,99.57 71.12,99.57 arc-90 73.66,97.03 73.66,52.58 arc-90
  pour Bottom (isolate 0.305, rank 2): 71.12,50.04 2.54,50.04 arc-90 0,52.58 0,97.03 arc-90 2.54,99.57 71.12,99.57 arc-90 73.66,97.03 73.66,52.58 arc-90
GND2  (via drill 0.38)
  Top 0.203: U3.21 120.47,14.91 v120.9,14.48 122.81,14.48 123.33,13.96 C17.2 C18.C | R17.1 v125.73,27.94 | U3.9 108.75,14.27 v108.71,14.22 | C24.C v102.11,22.1 | C23.2 v94.49,27.18
  Top 0.254: v115.19,23.37 114.05,23.37 113.54,22.86 SJ6.P$1
  pour Route15 (isolate 0.305, rank 2): 145.29,0 76.71,0 arc-90 74.17,2.54 74.17,46.99 arc-90 76.71,49.53 145.29,49.53 arc-90 147.83,46.99 147.83,2.54 arc-90
  pour Bottom (isolate 0.305, rank 2): 145.29,0 76.71,0 arc-90 74.17,2.54 74.17,46.99 arc-90 76.71,49.53 145.29,49.53 arc-90 147.83,46.99 147.83,2.54 arc-90
GND3  (via drill 0.38)
  Top 0.203: U4.21 120.47,64.95 v120.9,64.52 122.81,64.52 123.33,63.99 C25.2 C26.C | R23.1 v125.73,77.98 | U4.9 108.75,64.3 v108.71,64.26 | C32.C v102.11,72.14 | C31.2 v94.49,77.22
  Top 0.254: v115.19,73.41 114.05,73.41 113.54,72.9 SJ8.P$1
  pour Route15 (isolate 0.305, rank 2): 145.29,50.04 76.71,50.04 arc-90 74.17,52.58 74.17,97.03 arc-90 76.71,99.57 145.29,99.57 arc-90 147.83,97.03 147.83,52.58 arc-90
  pour Bottom (isolate 0.305, rank 2): 145.29,50.04 76.71,50.04 arc-90 74.17,52.58 74.17,97.03 arc-90 76.71,99.57 145.29,99.57 arc-90 147.83,97.03 147.83,52.58 arc-90
MISO  (via drill 0.38)
  Top 0.203: U1.18 43.55,12.96 v44.2,12.32
  Route2 0.203: JP2.3 16.51,41.91 22.86,41.91 25.4,39.37 29.21,39.37 JP1.3
  Route15 0.203: v44.2,12.32 43.56,12.95 43.56,13.84 44.2,14.48 45.21,14.48 45.85,15.11 45.85,34.92 45.47,35.31 30.86,35.31 30.48,35.69 JP1.3
MISO1  (via drill 0.38)
  Top 0.203: U2.18 43.55,63 v44.2,62.36
  Route2 0.203: JP10.3 16.51,91.95 22.86,91.95 25.4,89.41 29.21,89.41 JP15.3
  Route15 0.203: v44.2,62.36 43.56,62.99 43.56,63.88 44.2,64.52 45.21,64.52 45.85,65.15 45.85,84.96 45.47,85.34 30.86,85.34 30.48,85.72 JP15.3
MISO2  (via drill 0.38)
  Top 0.203: U3.18 117.72,12.96 v118.36,12.32
  Route2 0.203: JP19.3 90.68,41.91 97.03,41.91 99.57,39.37 103.38,39.37 JP24.3
  Route15 0.203: v118.36,12.32 117.73,12.95 117.73,13.84 118.36,14.48 119.38,14.48 120.02,15.11 120.02,34.92 119.63,35.31 105.03,35.31 104.65,35.69 JP24.3
MISO3  (via drill 0.38)
  Top 0.203: U4.18 117.72,63 v118.36,62.36
  Route2 0.203: JP28.3 90.68,91.95 97.03,91.95 99.57,89.41 103.38,89.41 JP33.3
  Route15 0.203: v118.36,62.36 117.73,62.99 117.73,63.88 118.36,64.52 119.38,64.52 120.02,65.15 120.02,84.96 119.63,85.34 105.03,85.34 104.65,85.72 JP33.3
MOSI  (via drill 0.38)
  Top 0.203: U1.20 45.17,14.27 v45.85,13.59
  Route2 0.203: JP2.5 13.97,39.37 24.13,39.37 27.94,35.56 31.75,35.56 33.02,36.83 JP1.5
  Route15 0.203: v45.85,13.59 47.12,12.45 51.44,12.45 51.82,12.83 51.82,21.21 51.44,21.59 47.5,21.59 46.74,22.35 46.74,35.31 46.23,35.81 33.53,35.81 33.02,36.32 JP1.5
MOSI1  (via drill 0.38)
  Top 0.203: U2.20 45.17,64.3 v45.85,63.63
  Route2 0.203: JP10.5 13.97,89.41 24.13,89.41 27.94,85.6 31.75,85.6 33.02,86.87 JP15.5
  Route15 0.203: v45.85,63.63 47.12,62.48 51.44,62.48 51.82,62.87 51.82,71.25 51.44,71.63 47.5,71.63 46.74,72.39 46.74,85.34 46.23,85.85 33.53,85.85 33.02,86.36 JP15.5
MOSI2  (via drill 0.38)
  Top 0.203: U3.20 119.34,14.27 v120.02,13.59
  Route2 0.203: JP19.5 88.14,39.37 98.3,39.37 102.11,35.56 105.92,35.56 107.19,36.83 JP24.5
  Route15 0.203: v120.02,13.59 121.28,12.45 125.6,12.45 125.98,12.83 125.98,21.21 125.6,21.59 121.67,21.59 120.9,22.35 120.9,35.31 120.4,35.81 107.7,35.81 107.19,36.32 JP24.5
MOSI3  (via drill 0.38)
  Top 0.203: U4.20 119.34,64.3 v120.02,63.63
  Route2 0.203: JP28.5 88.14,89.41 98.3,89.41 102.11,85.6 105.92,85.6 107.19,86.87 JP33.5
  Route15 0.203: v120.02,63.63 121.28,62.48 125.6,62.48 125.98,62.87 125.98,71.25 125.6,71.63 121.67,71.63 120.9,72.39 120.9,85.34 120.4,85.85 107.7,85.85 107.19,86.36 JP33.5
N$1
  Top 0.203: C11.2 33.16,63.36 33.27,63.25 34.92,63.25 35.33,63.65 U2.10
N$2
  Top 0.203: C11.1 30.65,64.01 D2.3
N$3
  Top 0.203: U2.11 35.44,63 35.05,62.61 33.78,62.61 32.81,61.64 D2.2 C12.1
N$4  (via drill 0.38)
  Top 0.203: U2.4 34.3,67.55 33.4,68.45 33.4,70.1 34.29,70.99 34.29,78.36 34.04,78.61 v31.77,78.6 | R9.1 29.2,78.6 v29.21,78.61
  Route2 0.254: v29.21,78.61 31.75,78.61 v31.77,78.6
N$5  (via drill 0.38)
  Top 0.203: U1.4 34.3,17.52 33.4,18.41 33.4,20.07 34.29,20.95 34.29,28.32 34.04,28.57 v31.77,28.56 | R3.1 29.2,28.56 v29.21,28.57
  Route2 0.254: v29.21,28.57 31.75,28.57 v31.77,28.56
N$6
  Top 0.203: JP5.1 5.08,27.94 7,29.86 C7.1 R3.2
N$7
  Top 0.203: C6.2 33.16,13.32 33.27,13.21 34.92,13.21 35.33,13.62 U1.10
N$8
  Top 0.203: C6.1 30.65,13.97 D1.3
N$9
  Top 0.203: U1.11 35.44,12.96 35.05,12.57 33.78,12.57 32.81,11.6 D1.2 C5.1
N$10
  Top 0.203: JP14.1 5.08,77.98 7,79.9 C15.1 R9.2
N$11
  Top 0.203: R6.1 53.99,30.08 54.36,30.48 60.58,30.48 60.96,30.1 R4.P$1
N$12
  Top 0.203: R12.1 53.99,80.12 54.36,80.52 60.58,80.52 60.96,80.14 R10.P$1
N$13
  Top 0.203: C19.2 107.33,13.32 107.44,13.21 109.09,13.21 109.5,13.62 U3.10
N$14
  Top 0.203: C19.1 104.82,13.97 D3.3
N$15
  Top 0.203: U3.11 109.61,12.96 109.22,12.57 107.95,12.57 106.98,11.6 D3.2 C20.1
N$16  (via drill 0.38)
  Top 0.203: U3.4 108.47,17.52 107.57,18.41 107.57,20.07 108.46,20.95 108.46,28.32 108.2,28.57 v105.93,28.56 | R15.1 103.36,28.56 v103.38,28.57
  Route2 0.254: v103.38,28.57 105.92,28.57 v105.93,28.56
N$17
  Top 0.203: JP23.1 79.25,27.94 81.17,29.86 C23.1 R15.2
N$18
  Top 0.203: R18.1 128.16,30.08 128.52,30.48 134.75,30.48 135.13,30.1 R16.P$1
N$19
  Top 0.203: C27.2 107.33,63.36 107.44,63.25 109.09,63.25 109.5,63.65 U4.10
N$20
  Top 0.203: C27.1 104.82,64.01 D4.3
N$21
  Top 0.203: U4.11 109.61,63 109.22,62.61 107.95,62.61 106.98,61.64 D4.2 C28.1
N$22  (via drill 0.38)
  Top 0.203: U4.4 108.47,67.55 107.57,68.45 107.57,70.1 108.46,70.99 108.46,78.36 108.2,78.61 v105.93,78.6 | R21.1 103.36,78.6 v103.38,78.61
  Route2 0.254: v103.38,78.61 105.92,78.61 v105.93,78.6
N$23
  Top 0.203: JP32.1 79.25,77.98 81.17,79.9 C31.1 R21.2
N$24
  Top 0.203: R24.1 128.16,80.12 128.52,80.52 134.75,80.52 135.13,80.14 R22.P$1
OSCIN
  Top 0.203: U1.7 32.7,15.56 31.88,16.38 31.37,16.38 30.86,16.89 30.86,33.4 JP1.7
  Bottom 0.203: JP1.7 JP1.8
OSCIN1
  Top 0.203: U2.7 32.7,65.6 31.88,66.42 31.37,66.42 30.86,66.93 30.86,83.44 JP15.7
  Bottom 0.203: JP15.7 JP15.8
OSCIN2
  Top 0.203: U3.7 106.86,15.56 106.05,16.38 105.54,16.38 105.03,16.89 105.03,33.4 JP24.7
  Bottom 0.203: JP24.7 JP24.8
OSCIN3
  Top 0.203: U4.7 106.86,65.6 106.05,66.42 105.54,66.42 105.03,66.93 105.03,83.44 JP33.7
  Bottom 0.203: JP33.7 JP33.8
OSCOUT  (via drill 0.38)
  Top 0.203: U1.8 35.25,14.91 35.18,14.99 32.13,14.99 31.37,15.75 30.73,15.75 30.23,16.26 30.23,35.81 v29.21,36.83
  Bottom 0.203: JP2.8 JP2.7 11.43,41.91 22.86,41.91 25.4,39.37 28.96,39.37 29.21,39.12 v29.21,36.83
OSCOUT1  (via drill 0.38)
  Top 0.203: U2.8 35.25,64.95 35.18,65.02 32.13,65.02 31.37,65.79 30.73,65.79 30.23,66.29 30.23,85.85 v29.21,86.87
  Bottom 0.203: JP10.8 JP10.7 11.43,91.95 22.86,91.95 25.4,89.41 28.96,89.41 29.21,89.15 v29.21,86.87
OSCOUT2  (via drill 0.38)
  Top 0.203: U3.8 109.42,14.91 109.35,14.99 106.3,14.99 105.54,15.75 104.9,15.75 104.39,16.26 104.39,35.81 v103.38,36.83
  Bottom 0.203: JP19.8 JP19.7 85.6,41.91 97.03,41.91 99.57,39.37 103.12,39.37 103.38,39.12 v103.38,36.83
OSCOUT3  (via drill 0.38)
  Top 0.203: U4.8 109.42,64.95 109.35,65.02 106.3,65.02 105.54,65.79 104.9,65.79 104.39,66.29 104.39,85.85 v103.38,86.87
  Bottom 0.203: JP28.8 JP28.7 85.6,91.95 97.03,91.95 99.57,89.41 103.12,89.41 103.38,89.15 v103.38,86.87
OUT1A
  Top 0.254: U1.1 36.4,20.91 36.45,20.95
  Top 1.93: JP8.2 65.97,22.55 63.37,25.15 39.06,25.09 36.45,22.48 36.45,20.95
OUT1A1
  Top 0.254: U2.1 36.4,70.94 36.45,70.99
  Top 1.93: JP12.2 65.97,72.59 63.37,75.18 39.06,75.13 36.45,72.52 36.45,70.99
OUT1A2
  Top 0.254: U3.1 110.57,20.91 110.62,20.95
  Top 1.93: JP21.2 140.14,22.55 137.54,25.15 113.23,25.09 110.62,22.48 110.62,20.95
OUT1A3
  Top 0.254: U4.1 110.57,70.94 110.62,70.99
  Top 1.93: JP30.2 140.14,72.59 137.54,75.18 113.23,75.13 110.62,72.52 110.62,70.99
OUT1B
  Top 0.254: U1.14 36.4,9.57 36.45,9.53
  Top 1.93: JP9.1 66.04,7.62 63.5,5.08 38.1,5.08 36.45,6.73 36.45,9.53
OUT1B1
  Top 0.254: U2.14 36.4,59.61 36.45,59.56
  Top 1.93: JP13.1 66.04,57.66 63.5,55.12 38.1,55.12 36.45,56.77 36.45,59.56
OUT1B2
  Top 0.254: U3.14 110.57,9.57 110.62,9.53
  Top 1.93: JP22.1 140.21,7.62 137.67,5.08 112.27,5.08 110.62,6.73 110.62,9.53
OUT1B3
  Top 0.254: U4.14 110.57,59.61 110.62,59.56
  Top 1.93: JP31.1 140.21,57.66 137.67,55.12 112.27,55.12 110.62,56.77 110.62,59.56
OUT2A
  Top 0.254: U1.28 42.34,20.88 42.42,20.95
  Top 1.93: JP8.1 64.52,19.05 61.98,21.59 43.05,21.59 42.42,20.95
OUT2A1
  Top 0.254: U2.28 42.34,70.92 42.42,70.99
  Top 1.93: JP12.1 64.52,69.09 61.98,71.63 43.05,71.63 42.42,70.99
OUT2A2
  Top 0.254: U3.28 116.51,20.88 116.59,20.95
  Top 1.93: JP21.1 138.68,19.05 136.14,21.59 117.22,21.59 116.59,20.95
OUT2A3
  Top 0.254: U4.28 116.51,70.92 116.59,70.99
  Top 1.93: JP30.1 138.68,69.09 136.14,71.63 117.22,71.63 116.59,70.99
OUT2B
  Top 0.254: U1.15 42.34,9.6 42.42,9.53
  Top 1.93: JP9.2 64.84,11.12 62.36,8.64 43.36,8.58 42.42,9.53
OUT2B1
  Top 0.254: U2.15 42.34,59.64 42.42,59.56
  Top 1.93: JP13.2 64.84,61.16 62.36,58.67 43.36,58.62 42.42,59.56
OUT2B2
  Top 0.254: U3.15 116.51,9.6 116.59,9.53
  Top 1.93: JP22.2 139.01,11.12 136.53,8.64 117.53,8.58 116.59,9.53
OUT2B3
  Top 0.254: U4.15 116.51,59.64 116.59,59.56
  Top 1.93: JP31.2 139.01,61.16 136.53,58.67 117.53,58.62 116.59,59.56
PGND  (via drill 0.38)
  Top 0.203: v40.64,19.3 39.88,19.3 39.37,19.81 SJ2.P$2 | U1.29 v40.01,15.24 | C4.2 v20.95,6.35 | C3.- v19.05,13.97
  Top 0.254: U1.27 41.13,18.82 v40.64,19.3 | U1.13 37.61,11.66 v37.85,11.43
  other vias: 40.01,12.95 38.73,12.95 40.01,14.1 38.73,14.1 38.73,15.24 40.01,16.38 38.73,16.38 40.01,17.53 38.73,17.53
  pour Route15 (isolate 0.305): 0,5.08 45.72,5.08 45.72,21.59 11.43,21.59 7.62,12.7 0,12.7
  pour Bottom (isolate 0.305): 35.56,8.89 35.56,21.59 43.18,21.59 43.18,8.89
PGND1  (via drill 0.38)
  Top 0.203: v40.64,69.34 39.88,69.34 39.37,69.85 SJ4.P$2 | U2.29 v40.01,65.28 | C13.2 v20.95,56.39 | C14.- v19.05,64.01
  Top 0.254: U2.27 41.13,68.85 v40.64,69.34 | U2.13 37.61,61.7 v37.85,61.47
  other vias: 40.01,62.99 38.73,62.99 40.01,64.14 38.73,64.14 38.73,65.28 40.01,66.42 38.73,66.42 40.01,67.56 38.73,67.56
  pour Route15 (isolate 0.305): 0,55.12 45.72,55.12 45.72,71.63 11.43,71.63 7.62,62.74 0,62.74
  pour Bottom (isolate 0.305): 35.56,58.93 35.56,71.63 43.18,71.63 43.18,58.93
PGND2  (via drill 0.38)
  Top 0.203: v114.81,19.3 114.05,19.3 113.54,19.81 SJ6.P$2 | U3.29 v114.17,15.24 | C21.2 v95.12,6.35 | C22.- v93.22,13.97
  Top 0.254: U3.27 115.3,18.82 v114.81,19.3 | U3.13 111.78,11.66 v112.01,11.43
  other vias: 114.17,12.95 112.9,12.95 114.17,14.1 112.9,14.1 112.9,15.24 114.17,16.38 112.9,16.38 114.17,17.53 112.9,17.53
  pour Route15 (isolate 0.305): 74.17,5.08 119.89,5.08 119.89,21.59 85.6,21.59 81.79,12.7 74.17,12.7
  pour Bottom (isolate 0.305): 109.73,8.89 109.73,21.59 117.35,21.59 117.35,8.89
PGND3  (via drill 0.38)
  Top 0.203: v114.81,69.34 114.05,69.34 113.54,69.85 SJ8.P$2 | U4.29 v114.17,65.28 | C29.2 v95.12,56.39 | C30.- v93.22,64.01
  Top 0.254: U4.27 115.3,68.85 v114.81,69.34 | U4.13 111.78,61.7 v112.01,61.47
  other vias: 114.17,62.99 112.9,62.99 114.17,64.14 112.9,64.14 112.9,65.28 114.17,66.42 112.9,66.42 114.17,67.56 112.9,67.56
  pour Route15 (isolate 0.305): 74.17,55.12 119.89,55.12 119.89,71.63 85.6,71.63 81.79,62.74 74.17,62.74
  pour Bottom (isolate 0.305): 109.73,58.93 109.73,71.63 117.35,71.63 117.35,58.93
RESETN  (via drill 0.51)
  Top 0.203: U1.3 34.54,18.16 34.04,18.67 34.04,19.68 34.92,20.57 34.92,23.24 46.1,34.42 46.1,38.48 v46.99,39.37
  Top 0.254: JP3.1 60.96,40.64 JP4.1
  Bottom 0.203: v46.99,39.37 52.07,39.37 JP3.1
RESETN1  (via drill 0.51)
  Top 0.203: U2.3 34.54,68.2 34.04,68.71 34.04,69.72 34.92,70.61 34.92,73.28 46.1,84.45 46.1,88.52 v46.99,89.41
  Top 0.254: JP17.1 60.96,90.68 JP18.1
  Bottom 0.203: v46.99,89.41 52.07,89.41 JP17.1
RESETN2  (via drill 0.51)
  Top 0.203: U3.3 108.71,18.16 108.2,18.67 108.2,19.68 109.09,20.57 109.09,23.24 120.27,34.42 120.27,38.48 v121.16,39.37
  Top 0.254: JP26.1 135.13,40.64 JP27.1
  Bottom 0.203: v121.16,39.37 126.24,39.37 JP26.1
RESETN3  (via drill 0.51)
  Top 0.203: U4.3 108.71,68.2 108.2,68.71 108.2,69.72 109.09,70.61 109.09,73.28 120.27,84.45 120.27,88.52 v121.16,89.41
  Top 0.254: JP35.1 135.13,90.68 JP36.1
  Bottom 0.203: v121.16,89.41 126.24,89.41 JP35.1
SCK  (via drill 0.38)
  Top 0.203: U1.19 44.42,13.62 v44.58,13.46
  Route15 0.203: v44.58,13.46 46.35,11.56 52.07,11.56 52.58,12.06 52.58,21.59 51.94,22.23 49.4,22.23 48.77,22.86 48.77,35.31 47.62,36.32 40.89,36.32 40.01,37.21 40.01,42.16 39.5,42.55 33.4,42.55 33.02,42.16 JP1.6
  Bottom 0.203: JP2.6 13.97,39.37 24.13,39.37 25.4,38.1 25.4,36.83 26.67,35.56 30.48,35.56 31.75,36.83 31.75,39.37 JP1.6
SCK1  (via drill 0.38)
  Top 0.203: U2.19 44.42,63.65 v44.58,63.5
  Route15 0.203: v44.58,63.5 46.35,61.59 52.07,61.59 52.58,62.1 52.58,71.63 51.94,72.26 49.4,72.26 48.77,72.9 48.77,85.34 47.62,86.36 40.89,86.36 40.01,87.25 40.01,92.2 39.5,92.58 33.4,92.58 33.02,92.2 JP15.6
  Bottom 0.203: JP10.6 13.97,89.41 24.13,89.41 25.4,88.14 25.4,86.87 26.67,85.6 30.48,85.6 31.75,86.87 31.75,89.41 JP15.6
SCK2  (via drill 0.38)
  Top 0.203: U3.19 118.59,13.62 v118.75,13.46
  Route15 0.203: v118.75,13.46 120.52,11.56 126.24,11.56 126.75,12.06 126.75,21.59 126.11,22.23 123.57,22.23 122.94,22.86 122.94,35.31 121.79,36.32 115.06,36.32 114.17,37.21 114.17,42.16 113.67,42.55 107.57,42.55 107.19,42.16 JP24.6
  Bottom 0.203: JP19.6 88.14,39.37 98.3,39.37 99.57,38.1 99.57,36.83 100.84,35.56 104.65,35.56 105.92,36.83 105.92,39.37 JP24.6
SCK3  (via drill 0.38)
  Top 0.203: U4.19 118.59,63.65 v118.75,63.5
  Route15 0.203: v118.75,63.5 120.52,61.59 126.24,61.59 126.75,62.1 126.75,71.63 126.11,72.26 123.57,72.26 122.94,72.9 122.94,85.34 121.79,86.36 115.06,86.36 114.17,87.25 114.17,92.2 113.67,92.58 107.57,92.58 107.19,92.2 JP33.6
  Bottom 0.203: JP28.6 88.14,89.41 98.3,89.41 99.57,88.14 99.57,86.87 100.84,85.6 104.65,85.6 105.92,86.87 105.92,89.41 JP33.6
STCK  (via drill 0.38)
  Top 0.203: U1.25 46.73,17.52 v46.99,17.78
  Top 0.254: JP3.6 48.26,34.29 v58.17,34.29 68.58,34.29 71.12,36.83 71.12,39.37 69.85,40.64 JP4.6
  Route2 0.203: v46.99,17.78 46.99,19.68 47.37,20.07 60.83,20.07 62.61,21.84 62.61,33.91 62.23,34.29 v58.17,34.29
STCK1  (via drill 0.38)
  Top 0.203: U2.25 46.73,67.55 v46.99,67.82
  Top 0.254: JP17.6 48.26,84.33 v58.17,84.33 68.58,84.33 71.12,86.87 71.12,89.41 69.85,90.68 JP18.6
  Route2 0.203: v46.99,67.82 46.99,69.72 47.37,70.1 60.83,70.1 62.61,71.88 62.61,83.95 62.23,84.33 v58.17,84.33
STCK2  (via drill 0.38)
  Top 0.203: U3.25 120.89,17.52 v121.16,17.78
  Top 0.254: JP26.6 122.43,34.29 v132.33,34.29 142.75,34.29 145.29,36.83 145.29,39.37 144.02,40.64 JP27.6
  Route2 0.203: v121.16,17.78 121.16,19.68 121.54,20.07 135,20.07 136.78,21.84 136.78,33.91 136.4,34.29 v132.33,34.29
STCK3  (via drill 0.38)
  Top 0.203: U4.25 120.89,67.55 v121.16,67.82
  Top 0.254: JP35.6 122.43,84.33 v132.33,84.33 142.75,84.33 145.29,86.87 145.29,89.41 144.02,90.68 JP36.6
  Route2 0.203: v121.16,67.82 121.16,69.72 121.54,70.1 135,70.1 136.78,71.88 136.78,83.95 136.4,84.33 v132.33,84.33
VLOGIC  (via drill 0.38)
  Top 0.203: v44.96,11.05 C2.A 46.35,12.06 47.24,12.95 C1.1 | U1.17 41.52,12.31 40.64,11.43 v40.64,8.13 | v27.43,3.05 27.43,12.06 27.69,12.32 28.32,12.32 28.57,12.57 28.57,14.1 28.32,14.35 SJ1.2 | R2.2 v58.8,33.02 R1.2
  Route2 0.203: v44.96,11.05 44.96,3.56 44.45,3.05 40.64,3.05 v40.64,8.13
  Route2 0.254: 40.64,3.05 v27.43,3.05
  Route15 0.203: v44.96,11.05 54.74,11.05 56.52,12.83 56.52,23.11 53.98,25.65 53.98,29.21 54.61,29.72 55.75,29.72 56.52,30.48 v58.8,33.02
VLOGIC1  (via drill 0.38)
  Top 0.203: v44.96,61.09 C10.A 46.35,62.1 47.24,62.99 C9.1 | U2.17 41.52,62.35 40.64,61.47 v40.64,58.17 | v27.43,53.09 27.43,62.1 27.69,62.36 28.32,62.36 28.57,62.61 28.57,64.14 28.32,64.39 SJ3.2 | R8.2 v58.8,83.06 R7.2
  Route2 0.203: v44.96,61.09 44.96,53.59 44.45,53.09 40.64,53.09 v40.64,58.17
  Route2 0.254: 40.64,53.09 v27.43,53.09
  Route15 0.203: v44.96,61.09 54.74,61.09 56.52,62.87 56.52,73.15 53.98,75.69 53.98,79.25 54.61,79.76 55.75,79.76 56.52,80.52 v58.8,83.06
VLOGIC2  (via drill 0.38)
  Top 0.203: v119.13,11.05 C18.A 120.52,12.06 121.41,12.95 C17.1 | U3.17 115.69,12.31 114.81,11.43 v114.81,8.13 | v101.6,3.05 101.6,12.06 101.85,12.32 102.49,12.32 102.74,12.57 102.74,14.1 102.49,14.35 SJ5.2 | R14.2 v132.97,33.02 R13.2
  Route2 0.203: v119.13,11.05 119.13,3.56 118.62,3.05 114.81,3.05 v114.81,8.13
  Route2 0.254: 114.81,3.05 v101.6,3.05
  Route15 0.203: v119.13,11.05 128.91,11.05 130.68,12.83 130.68,23.11 128.14,25.65 128.14,29.21 128.78,29.72 129.92,29.72 130.68,30.48 v132.97,33.02
VLOGIC3  (via drill 0.38)
  Top 0.203: v119.13,61.09 C26.A 120.52,62.1 121.41,62.99 C25.1 | U4.17 115.69,62.35 114.81,61.47 v114.81,58.17 | v101.6,53.09 101.6,62.1 101.85,62.36 102.49,62.36 102.74,62.61 102.74,64.14 102.49,64.39 SJ7.2 | R20.2 v132.97,83.06 R19.2
  Route2 0.203: v119.13,61.09 119.13,53.59 118.62,53.09 114.81,53.09 v114.81,58.17
  Route2 0.254: 114.81,53.09 v101.6,53.09
  Route15 0.203: v119.13,61.09 128.91,61.09 130.68,62.87 130.68,73.15 128.14,75.69 128.14,79.25 128.78,79.76 129.92,79.76 130.68,80.52 v132.97,83.06
VS  (via drill 0.38)
  Top 0.203: R6.2 48.26,29.21 47.75,28.7 v47.75,27.94 | D1.1 C5.2 29.83,9.16 29.97,9.02 32,9.02 32.38,9.4 32.38,10.67 32.64,10.92 33.27,10.92 33.91,11.56 v34.8,11.56 | C3.+ v19.05,16.51 | C4.1 v17.27,6.35
  Top 0.254: U1.26 44.58,18.16 44.96,18.54 v44.96,18.92 | U1.2 35.16,18.82 v34.92,19.05 | U1.16 43.2,11.66 v43.81,11.05 | U1.12 35.56,12.31 v34.8,11.56
  Route2 0.203: v47.75,27.94 47.75,26.67 44.96,24.13 v44.96,18.92
  pour Route2 (isolate 0.305, rank 3): 0,21.59 45.72,21.59 45.72,5.08 10.16,5.08 7.62,12.7 0,12.7
VS1  (via drill 0.38)
  Top 0.203: R12.2 48.26,79.25 47.75,78.74 v47.75,77.98 | D2.1 C12.2 29.83,59.2 29.97,59.05 32,59.05 32.38,59.44 32.38,60.71 32.64,60.96 33.27,60.96 33.91,61.59 v34.8,61.59 | C14.+ v19.05,66.55 | C13.1 v17.27,56.39
  Top 0.254: U2.26 44.58,68.2 44.96,68.58 v44.96,68.96 | U2.2 35.16,68.85 v34.92,69.09 | U2.16 43.2,61.7 v43.81,61.09 | U2.12 35.56,62.35 v34.8,61.59
  Route2 0.203: v47.75,77.98 47.75,76.71 44.96,74.17 v44.96,68.96
  pour Route2 (isolate 0.305, rank 3): 0,71.63 45.72,71.63 45.72,55.12 10.16,55.12 7.62,62.74 0,62.74
VS2  (via drill 0.38)
  Top 0.203: R18.2 122.43,29.21 121.92,28.7 v121.92,27.94 | D3.1 C20.2 104,9.16 104.14,9.02 106.17,9.02 106.55,9.4 106.55,10.67 106.81,10.92 107.44,10.92 108.08,11.56 v108.97,11.56 | C22.+ v93.22,16.51 | C21.1 v91.44,6.35
  Top 0.254: U3.26 118.75,18.16 119.13,18.54 v119.13,18.92 | U3.2 109.33,18.82 v109.09,19.05 | U3.16 117.37,11.66 v117.98,11.05 | U3.12 109.72,12.31 v108.97,11.56
  Route2 0.203: v121.92,27.94 121.92,26.67 119.13,24.13 v119.13,18.92
  pour Route2 (isolate 0.305, rank 3): 74.17,21.59 119.89,21.59 119.89,5.08 84.33,5.08 81.79,12.7 74.17,12.7
VS3  (via drill 0.38)
  Top 0.203: R24.2 122.43,79.25 121.92,78.74 v121.92,77.98 | D4.1 C28.2 104,59.2 104.14,59.05 106.17,59.05 106.55,59.44 106.55,60.71 106.81,60.96 107.44,60.96 108.08,61.59 v108.97,61.59 | C30.+ v93.22,66.55 | C29.1 v91.44,56.39
  Top 0.254: U4.26 118.75,68.2 119.13,68.58 v119.13,68.96 | U4.2 109.33,68.85 v109.09,69.09 | U4.16 117.37,61.7 v117.98,61.09 | U4.12 109.72,62.35 v108.97,61.59
  Route2 0.203: v121.92,77.98 121.92,76.71 119.13,74.17 v119.13,68.96
  pour Route2 (isolate 0.305, rank 3): 74.17,71.63 119.89,71.63 119.89,55.12 84.33,55.12 81.79,62.74 74.17,62.74

## Text on the board
Bottom: v10 | v10 | v10 | v10
tPlace: GND | OSCOUT | MOSI | MISO | 3-5V | OUT | GND | SCK | OSCIN | 3-5V | IN | OUT | GND | FLAGN | RESETN | IN | BUSYN | CSN | STCK | GND | OSCOUT | MOSI | MISO | 3-5V | OUT | GND | SCK | OSCIN | 3-5V | IN | OUT | GND | FLAGN | RESETN | IN | BUSYN | CSN | STCK | 3-5V | OSCOUT | OSCOUT | SCK | SCK | GND | 3-5V | MISO | MOSI | OSCIN | GND | STCK | BUSYN | RESETN | FLAGN | GND | 3-5V | OSCOUT | OSCOUT | SCK | SCK | GND | 3-5V | MISO | MOSI | OSCIN | GND | STCK | BUSYN | RESETN | FLAGN | GND | SWITCH | SWITCH | O1A | O1A | O2A | O2A | 8-45V | 8-45V | 3V | 3V | MOTOR POWER | MOTOR POWER | EXT / 5V | EXT / 5V | O2B | O2B | GND | GND | O1B | O1B | L6470 AutoDriver | L6470 AutoDriver | GND | OSCOUT | MOSI | MISO | 3-5V | OUT | GND | SCK | OSCIN | 3-5V | IN | OUT | GND | FLAGN | RESETN | IN | BUSYN | CSN | STCK | GND | OSCOUT | MOSI | MISO | 3-5V | OUT | GND | SCK | OSCIN | 3-5V | IN | OUT | GND | FLAGN | RESETN | IN | BUSYN | CSN | STCK | 3-5V | OSCOUT | OSCOUT | SCK | SCK | GND | 3-5V | MISO | MOSI | OSCIN | GND | STCK | BUSYN | RESETN | FLAGN | GND | 3-5V | OSCOUT | OSCOUT | SCK | SCK | GND | 3-5V | MISO | MOSI | OSCIN | GND | STCK | BUSYN | RESETN | FLAGN | GND | SWITCH | SWITCH | O1A | O1A | O2A | O2A | 8-45V | 8-45V | 3V | 3V | MOTOR POWER | MOTOR POWER | EXT / 5V | EXT / 5V | O2B | O2B | GND | GND | O1B | O1B | L6470 AutoDriver | L6470 AutoDriver
bPlace: BREADBOARD / COMPATIBLE | BREADBOARD / COMPATIBLE | GND | OSCOUT | MOSI | MISO | 3-5V | GND | SCK | OSCIN | 3-5V | GND | FLAGN | RESETN | BUSYN | CSN | STCK | GND | OSCOUT | MOSI | MISO | 3-5V | GND | SCK | OSCIN | 3-5V | GND | FLAGN | RESETN | BUSYN | CSN | STCK | BREADBOARD / COMPATIBLE | BREADBOARD / COMPATIBLE | GND | OSCOUT | MOSI | MISO | 3-5V | GND | SCK | OSCIN | 3-5V | GND | FLAGN | RESETN | BUSYN | CSN | STCK | GND | OSCOUT | MOSI | MISO | 3-5V | GND | SCK | OSCIN | 3-5V | GND | FLAGN | RESETN | BUSYN | CSN | STCK